# EAGLE board 18650-pi (EAGLE 8.1.0)
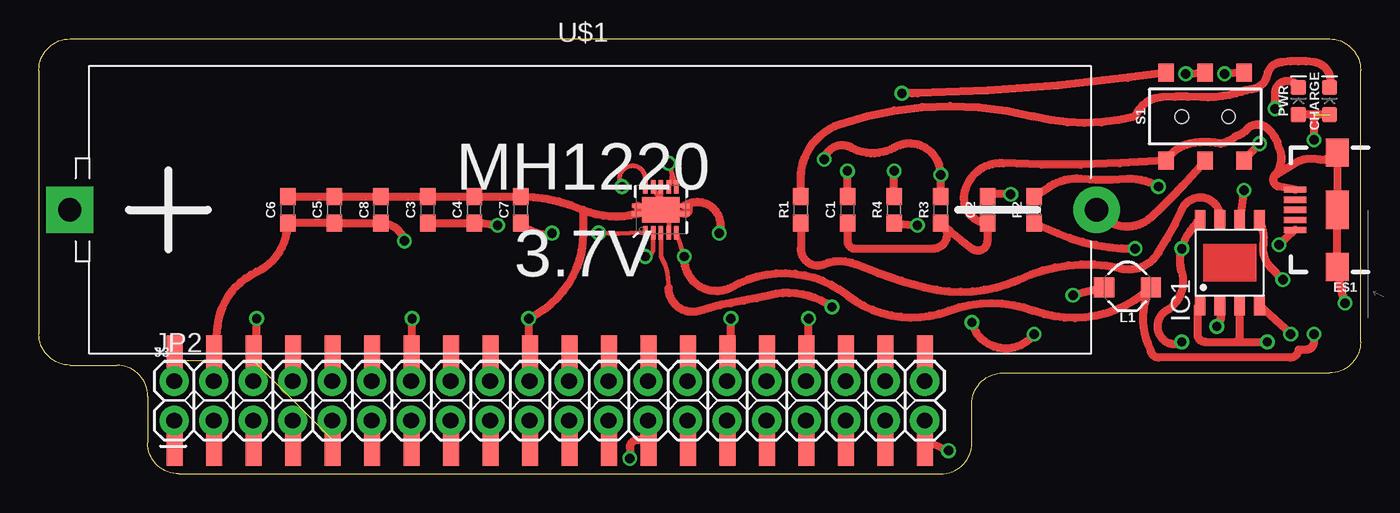
[diagram p0: board, top side]
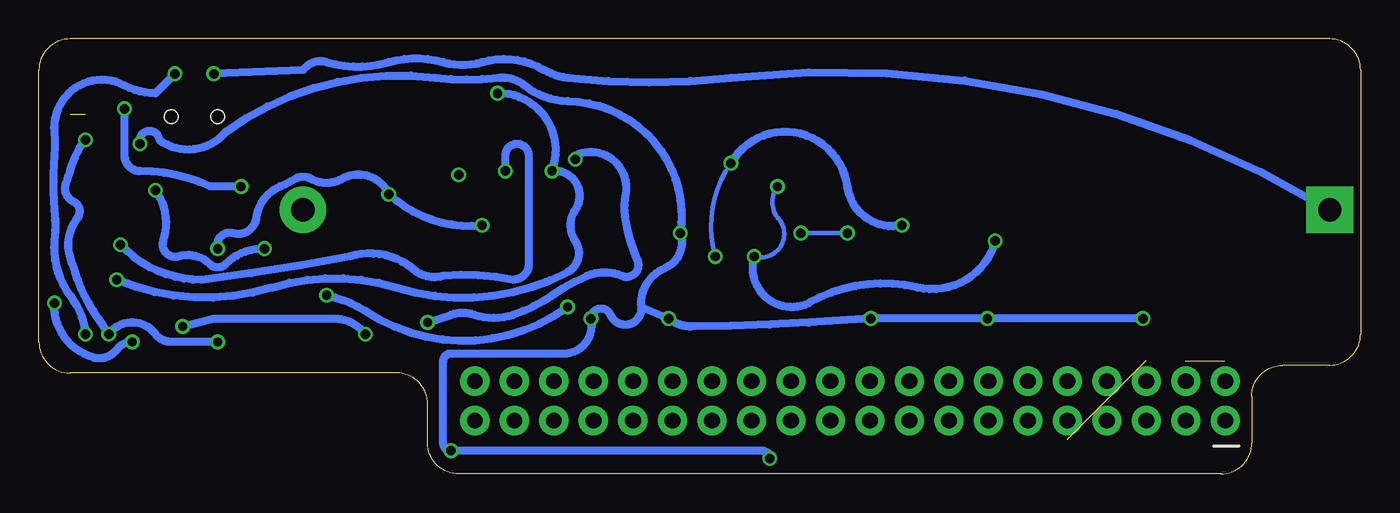
[diagram p1: board, bottom side, seen from below]

Size 85 x 28 mm. Coordinates in mm from the lower left corner, seen from the top.
Outline: 2,7 5,7 arc-90 7,5 7,2 arc90 9,0 58,0 arc90 60,2 60,4.5 arc-90 62,6.5 83,6.5 arc90 85,8.5 85,26 arc90 83,28 2,28 arc90 0,26 0,9 arc90 2,7
Copper layers (1*16): Top 0.0356mm / dielectric 1.5011mm / Bottom 0.0356mm
Design rules "LaenPCBOrder": minimum track width 6mil, minimum drill 13mil, track to track 6mil, track to pad 6mil, pad to pad 6mil, via to via 6mil, smd to smd 6mil, copper to edge 15mil, drill to drill 6mil, minimum pad ring 7mil, minimum via ring 7mil, stop-mask expansion 3mil, vias tented up to drill 0mil, thermal gap 10mil

## Footprints (pad centres in the part's own frame; a part is rotated, then mirrored left to right if it is on the bottom)
0603 = smd 1.1 x 1: 1 -0.85,0; 2 0.85,0
LED-0603 = smd 1 x 1: A -0.877,0; C 0.877,0
USB-B-MICRO-SMD = smd 1.45 x 0.4: D+ 2.725,0; D- 2.725,0.65; GND 2.725,-1.3; ID 2.725,-0.65; VBUS 2.725,1.3 | smd 1.5 x 1.8: SHIELD1 0,3.685; SHIELD2 0,-3.685 | smd 1.5 x 2.5: SHIELD3 0,0
SOP-8 = smd 1.3 x 0.7: 1 -2.75,1.905; 2 -2.75,0.635; 3 -2.75,-0.635; 4 -2.75,-1.905; 5 2.75,-1.905; 6 2.75,-0.635; 7 2.75,0.635; 8 2.75,1.905
2X20 = drill 1.016 pad 1.88: 1 0,0; 2 0,2.54; 3 2.54,0; 4 2.54,2.54; 5 5.08,0; 6 5.08,2.54; 7 7.62,0; 8 7.62,2.54; 9 10.16,0; 10 10.16,2.54; 11 12.7,0; 12 12.7,2.54; 13 15.24,0; 14 15.24,2.54; 15 17.78,0; 16 17.78,2.54; 17 20.32,0; 18 20.32,2.54; 19 22.86,0; 20 22.86,2.54; 21 25.4,0; 22 25.4,2.54; 23 27.94,0; 24 27.94,2.54; 25 30.48,0; 26 30.48,2.54; 27 33.02,0; 28 33.02,2.54; 29 35.56,0; 30 35.56,2.54; 31 38.1,0; 32 38.1,2.54; 33 40.64,0; 34 40.64,2.54; 35 43.18,0; 36 43.18,2.54; 37 45.72,0; 38 45.72,2.54; 39 48.26,0; 40 48.26,2.54
2X20SMD = smd 1.016 x 3.302: 1 -1.27,-3.81; 2 -1.27,1.27; 3 1.27,-3.81; 4 1.27,1.27; 5 3.81,-3.81; 6 3.81,1.27; 7 6.35,-3.81; 8 6.35,1.27; 9 8.89,-3.81; 10 8.89,1.27; 11 11.43,-3.81; 12 11.43,1.27; 13 13.97,-3.81; 14 13.97,1.27; 15 16.51,-3.81; 16 16.51,1.27; 17 19.05,-3.81; 18 19.05,1.27; 19 21.59,-3.81; 20 21.59,1.27; 21 24.13,-3.81; 22 24.13,1.27; 23 26.67,-3.81; 24 26.67,1.27; 25 29.21,-3.81; 26 29.21,1.27; 27 31.75,-3.81; 28 31.75,1.27; 29 34.29,-3.81; 30 34.29,1.27; 31 36.83,-3.81; 32 36.83,1.27; 33 39.37,-3.81; 34 39.37,1.27; 35 41.91,-3.81; 36 41.91,1.27; 37 44.45,-3.81; 38 44.45,1.27; 39 46.99,-3.81; 40 46.99,1.27
INDUCTOR_4.7UH = smd 1.3 x 1.3: P$1 -1.5,0; P$2 1.5,0
SWITCH_DPDT_SMD_AYZ0202 = smd 1 x 1.15: 1 -2.5,2.825; 2 0,2.825; 3 2.5,2.825; 4 -2.5,-2.825; 5 0,-2.825; 6 2.5,-2.825 | hole 0.85: 1.5,0; -1.5,0
QFN-10_PAD = smd 0.297 x 0.85: 1 -1,-1.475; 2 -0.5,-1.475; 3 0,-1.475; 4 0.5,-1.475; 5 1,-1.475; 6 1,1.475; 7 0.5,1.475; 8 0,1.475; 9 -0.5,1.475; 10 -1,1.475 | smd 0.7 x 0.28: 11 -1.5,0.25; 12 -1.5,-0.25; 13 1.5,0.25; 14 1.5,-0.25 | smd 2.4 x 1.65: 15 0,0
BATTERY-LI-MH12210 = drill 1.5 pad 3 square: BAT+ -33.02,0 | drill 1.5 pad 3: BAT- 33.02,0

## Placement (x,y rotation side)
C1  10uF  [0603]  52,17 90 top
C2  10uF  [0603]  61,17 90 top
C3  0.1uF  [0603]  25,17 90 top
C4  10uF  [0603]  28,17 90 top
C5  10uF  [0603]  19,17 90 top
C6  1.0uF  [0603]  16,17 90 top
C7  0.1uF  [0603]  31,17 90 top
C8  0.1uF  [0603]  22,17 90 top
CHARGE  [LED-0603]  83,24 90 top
E$1  [USB-B-MICRO-SMD]  83.5,17 180 top
IC1  TP4056  [SOP-8]  76.58,13.6 90 top
J3  CONN_20X2  [2X20]  8.7,3.44 0 top
JP2  [2X20SMD]  10,6 0 top
L1  2.2uH**  [INDUCTOR_4.7UH]  70,12 180 top
PWR  [LED-0603]  81,24 90 top
R1  1k  [0603]  49,17 90 top
R2  1k  [0603]  64,17 90 top
R3  1.20k  [0603]  58,17 90 top
R4  0R4  [0603]  55,17 90 top
S1  [SWITCH_DPDT_SMD_AYZ0202]  75,23 0 top
U1  TPS61200  [QFN-10_PAD]  40,17 0 top
U$1  BATTERY-LI-MH12210  [BATTERY-LI-MH12210]  35,17 0 top

## Library data of the parts
C1 C2 C4 C5 = SparkFun-Capacitors; PROD_ID: CAP-11015
C3 C7 C8 = SparkFun-Capacitors; PROD_ID: CAP-00810
C6 = SparkFun-Capacitors; PROD_ID: CAP-00868
CHARGE PWR = SparkFun-LED
E$1 J3 = SparkFun-Connectors
IC1 = TP4056
JP2 = pinhead-1
L1 = SparkFun-Coils; PROD_ID: NDUC-10146
R1 R2 = SparkFun-Resistors; PROD_ID: RES-07856
R3 = SparkFun-Resistors; PROD_ID: RES-08413
R4 = SparkFun-Resistors
S1 = SparkFun-Switches; PROD_ID: SWCH-08179; SF_SKU: COM-00597
U1 = SparkFun-IC-Power; PROD_ID: IC-10035
U$1 = diy-modules

## Nets
AGND: C1.1 C2.1 IC1.1 IC1.3 R3.1 S1.4
GND: C3.2 C4.2 C5.2 C6.2 C7.2 C8.2 JP2.6 JP2.9 JP2.14 JP2.20 JP2.25 JP2.30 JP2.34 JP2.39 S1.6 U1.4 U1.8 U1.9 U1.11 U1.12 U1.13 U1.14 U1.15
N$1: S1.2 U$1.BAT+
N$2: S1.5 U$1.BAT-
N$3: CHARGE.C R1.2
N$4: PWR.C R2.2
N$5: IC1.2 R3.2
N$6: IC1.7 R1.1
N$7: IC1.6 R2.1
N$8: R4.2
N$9: C2.2 CHARGE.A IC1.4 IC1.8 PWR.A R4.1
N$10: L1.P$2 U1.3
N$11: C1.2 IC1.5 S1.1
N$14: C7.1 U1.1
VCC: C5.1 C6.1 C8.1 JP2.2 JP2.4 U1.2 U1.10
VIN: C3.1 C4.1 L1.P$1 S1.3 U1.5 U1.6 U1.7

## Tracks (layer width: path | path; a pad name or v marks a point on that pad's centre or on a via)
AGND  (via drill 0.6)
  Top 0.5: C1.1 52,15 arc90 52.5,14.5 57.5,14.5 arc146 R3.1 arc5 60,14.5 arc127 61,15 C2.1 arc-97 59.5,18 arc-84 62,20 arc7 69.5,20 S1.4 arc-44 74,21.25 arc-27 76,21.25 arc27 77,21.75 arc40 77.75,22.25 arc-80 79,22.25 arc-38 79.75,21 arc-68 79.5,19.25 | v84,11 arc-18 83.5,13.32 83.5,17 83.5,20.69 arc-62 82.25,20.25 arc43 80.75,20 79.5,19.25 | IC1.1 arc90 74.5,10.68 74.5,9 arc90 75,8.5 77,8.5 | 77,8.5 arc90 77.22,8.71 IC1.3 | 77,8.5 v79,8.5 | 80.78,18.3 79.75,18.5 arc-121 79.5,19.25
  Bottom 0.5: v79,8.5 arc-53 80,8 arc69 81.5,7.5 arc76 v84,11
GND  (via drill 0.6)  (1 unrouted)
  Top 0.305: U1.4 40.57,16.91 | 40,17.5 U1.15 | 40,17.5 U1.8 | U1.9 40,17.5
  Top 0.5: C6.2 C5.2 C8.2 C3.2 C4.2 C7.2 arc-24 35,17 | U1.12 arc-40 35,17 | U1.11 U1.12 | U1.12 U1.15 40.57,16.91 U1.14 arc199 U1.13 arc-143 v43.75,15.5 | JP2.6 arc90 14,7.46 v14,10 | JP2.34 arc90 49.5,7.4 v49.5,10 | JP2.20 arc-90 31.5,7.36 v31.5,10 arc65 35,15.5 35,17 | JP2.25 38.5,2.19 arc90 38,1.69 v38,1 | JP2.30 arc90 44.5,7.48 v44.5,10 | JP2.14 arc90 24,7.3 v24,10 | S1.6 v78.5,21.25 | JP2.39 v58.5,1.5
  Bottom 0.5: v78.5,21.25 arc191 77.25,21.5 arc-87 73,22 arc43 59.5,25.5 arc-14 55.5,25.5 arc46 53.75,25 arc-38 51,24 arc97 v43.75,15.5 arc87 44.75,13.25 arc-73 46.25,10.75 | 46.25,10.75 arc163 48.25,10.25 arc-157 v49.5,10 arc104 51.25,7.75 58.5,7.75 arc-90 59,7.25 59,2 arc-90 v58.5,1.5 38.5,1.5 arc90 v38,1 | v14,10 v24,10 v31.5,10 35.5,9.75 arc3 43,9.5 arc37 v44.5,10 46.25,10.75
N$1  (via drill 0.6)
  Top 0.5: v73.75,25.75 S1.2
  Bottom 0.5: U$1.BAT+ arc-38 40.5,25.5 arc13 51,25.5 arc24 52.5,26 arc-47 56.5,26.5 arc33 59,26.5 arc-33 62.5,26.5 arc33 66.5,26.5 arc-69 68,26 v73.75,25.75
N$2
  Top 0.5: S1.5 73.5,18.5 arc-6 71.5,16.5 arc-100 U$1.BAT-
N$3
  Top 0.5: R1.2 49,19 arc-71 51.5,22.5 arc-33 64,23 arc29 70.5,23 arc-65 72.25,24.25 arc-6 74.75,24.25 arc18 77,24.5 arc-8 78,24.75 arc76 79,25.75 arc-76 80,26.5 arc-14 82,26.5 arc-102 CHARGE.C
N$4  (via drill 0.6)
  Top 0.5: R2.2 65,18.5 arc-38 67,19 arc10 70,19 arc-33 v72,18.5 | v79.5,23.5 79.5,24.5 arc-152 PWR.C
  Bottom 0.5: v79.5,23.5 79.5,20.5 arc-90 78.5,19.5 arc25 74,18.5 v72,18.5
N$5  (via drill 0.6)
  Top 0.5: v75.75,9.5 arc63 IC1.2 | v64,9 arc-129 v60,9.75 | R3.2 v58,19.25 arc119 55,21 arc-59 52.25,21 arc105 v50.5,20.25
  Bottom 0.5: v75.75,9.5 73.75,10 66,10 arc53 v64,9 | v60,9.75 58.5,10.25 arc37 57,10.25 arc-37 54.5,10.25 arc-16 52,11.5 arc11 49.75,12.75 arc47 47.5,12.75 arc-137 46.5,13.75 arc13 47.25,16.25 arc20 47.25,18 arc-125 50.5,20.5 arc-130 v50.5,20.25
N$6
  Top 0.5: R1.1 49,14.5 arc113 50.5,13.5 arc-45 52.5,13.5 arc8 57,12 arc38 63,12.5 arc-39 69.5,13.25 arc74 72,14.25 arc10 73.5,17 arc-166 IC1.7
N$7  (via drill 0.6)
  Top 0.5: R2.1 65.5,15.5 arc24 v70.5,14.5 | v77.5,18.25 IC1.6
  Bottom 0.5: v70.5,14.5 arc-45 73,13.5 arc89 74,13.5 arc-61 76,14 arc123 77,15 arc-55 v77.5,18.25
N$8  (via drill 0.6)
  Top 0.5: R4.2 v55,19.5 | 80.78,15.7 v79.75,14.75
  Bottom 0.5: v55,19.5 55,20.5 arc180 53.5,20.5 53.5,13.5 arc90 54.5,12.5 arc-16 59,12.75 arc61 61,13.25 arc-55 65,14 arc4 74.5,12.5 arc48 v79.75,14.75
N$9  (via drill 0.6)  (1 unrouted)
  Top 0.5: R4.1 v56.5,16 | v62.5,18 61.15,18 arc90 C2.2 | CHARGE.A PWR.A | IC1.8 arc34 v73.5,14.5 arc31 73.5,13 arc-74 72.5,10.5 arc118 72.5,8.5 arc62 v73.5,8.5 | 82,23.12 v82,21.5 | v80.5,9 IC1.4
  Bottom 0.5: v56.5,16 arc48 v62.5,18 arc-96 65.5,19 arc59 67.5,19 arc-59 68.5,19 arc6 69.5,18.5 arc-59 71,16.5 arc98 72.5,15.5 arc-121 v73.5,14.5 | v73.5,8.5 76.5,8.5 arc53 77.5,9 arc-106 v80.5,9 arc1 81.5,10.5 arc13 82.5,12.5 arc3 83,14 arc34 83,15.5 arc19 82.5,16.5 arc-101 82.75,17.5 arc85 83.25,18.75 arc-5 83,19.5 arc11 82.5,20.75 arc13 v82,21.5
N$10  (via drill 0.6)
  Top 0.305: 40.5,12 arc31 40,14 U1.3
  Top 0.5: L1.P$2 v66.5,11.5 | v51,10.75 arc50 47,11.5 arc-2 44.5,11 arc7 42.5,10.5 arc-109 40.5,12
  Bottom 0.5: v66.5,11.5 arc18 64,10.5 arc-70 v51,10.75
N$11  (via drill 0.6)
  Top 0.5: C1.2 v52,19.5 | S1.1 70,25.5 arc-6 56.5,24.5 arc-2 v55.5,24.5 | v80,12.5 79.25,13.25 arc-37 78.75,14.25 arc-16 78.75,14.75 arc35 IC1.5
  Bottom 0.5: v80,12.5 arc-40 70,12 arc35 62,12 arc-45 51,13 arc-97 50.5,15 arc68 50.5,17 arc-130 v52,19.5 arc-112 v55.5,24.5
N$14  (via drill 0.6)
  Top 0.305: U1.1 38,15.5 arc-3 v36,15.5 | v33,15.5 arc-39 C7.1
  Bottom 0.305: v36,15.5 arc3 v33,15.5
VCC  (via drill 0.6)  (1 unrouted)
  Top 0.305: U1.10 39,19 arc217 v37.5,18.5 | U1.2 39.5,14.5 arc-90 v39,14
  Top 0.5: JP2.4 11.5,9.5 arc-59 14,13 arc66 C6.1 C5.1 C8.1 arc-75 v23.5,15
  Bottom 0.305: v37.5,18.5 arc-74 37.5,16.5 arc151 v39,14
  Bottom 0.5: v23.5,15 arc88 28.5,12 arc-42 35.5,11 arc132 v39,14
VIN  (via drill 0.6)
  Top 0.305: U1.7 arc60 v40.5,20 U1.6 | U1.5 v41.5,14
  Top 0.5: C3.1 C4.1 arc-11 v29.5,16 | v41.5,14 arc121 44.5,12 arc-69 52,11.5 arc59 58.5,10.5 arc-41 64,10.5 arc64 L1.P$1 arc54 71.5,8 arc90 72,7.5 80.5,7.5 arc90 81,8 81.5,8 arc90 82,8.5 v82,9 | S1.3 v76.25,25.75
  Bottom 0.305: v40.5,20 arc-51 v41.5,14
  Bottom 0.5: v29.5,16 arc94 33,18.5 arc-142 v40.5,20 | v76.25,25.75 77.5,24.5 arc28 79.5,25 arc-124 84,22 arc11 84,20.5 arc-11 84,17 arc11 84,15 arc-43 83,11.5 arc31 v82,9